# Altium PCB PL_Remote.PcbDoc
Units mil, origin at the board's own origin, x right, y up, seen from the top; angles counter-clockwise.
Board outline 1770 x 4885 mil, 2 copper layers (Top Layer, Bottom Layer); 43 components, 28 nets, 186 pads, 25 vias.
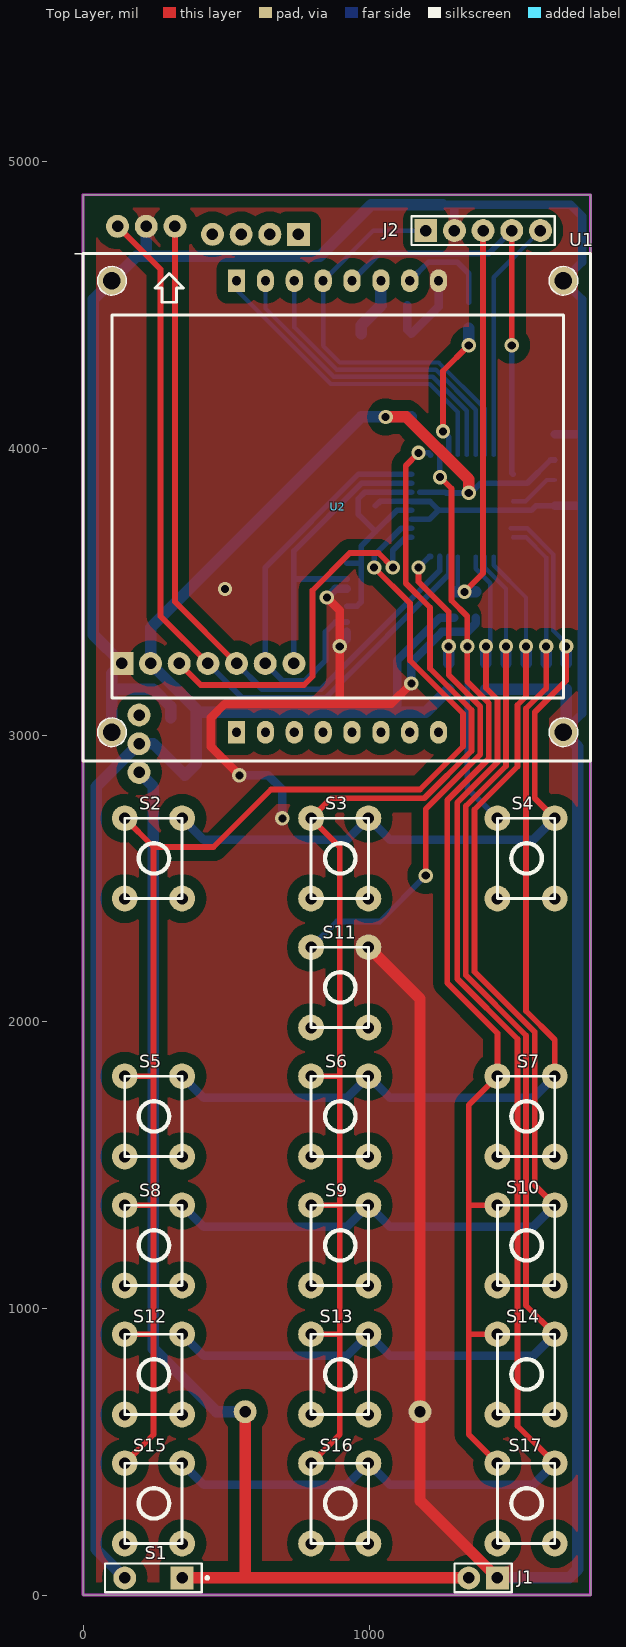
[diagram p0: Top Layer view]
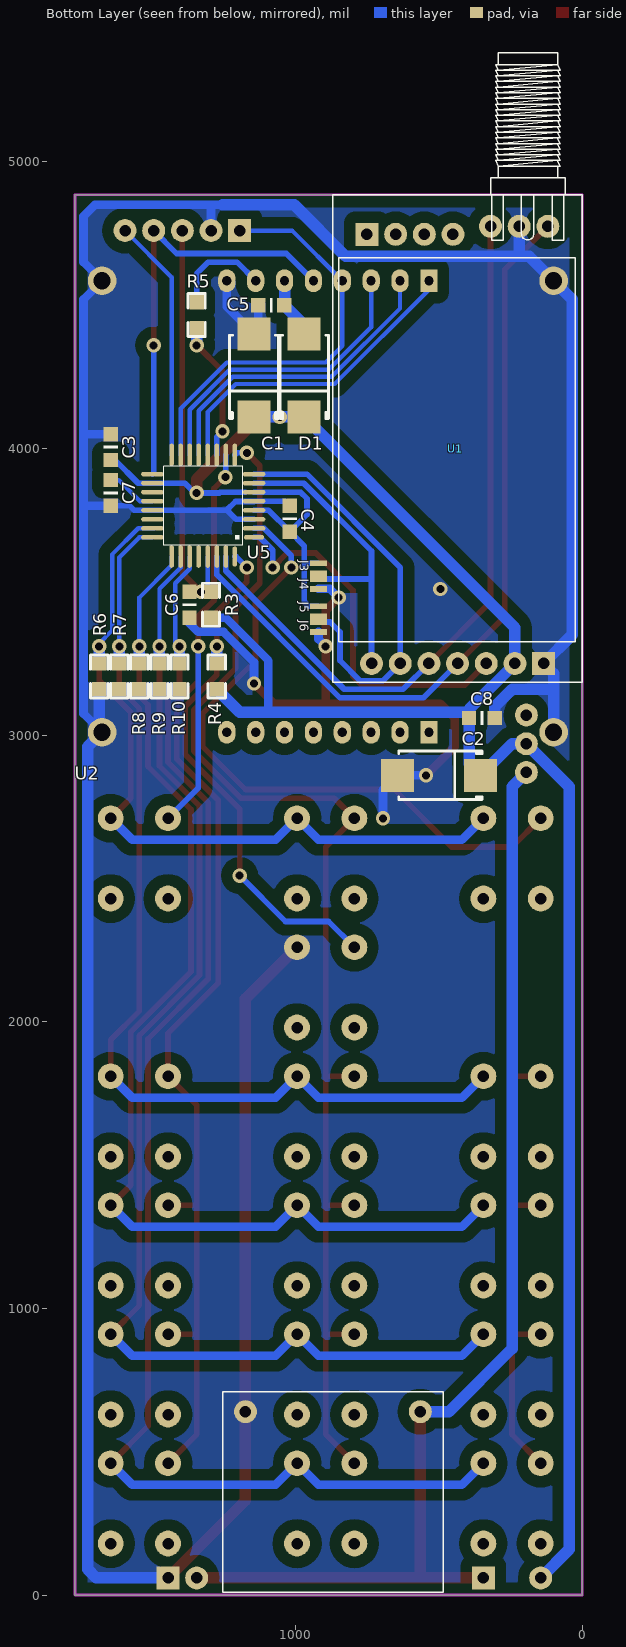
[diagram p1: Bottom Layer view, seen from below]
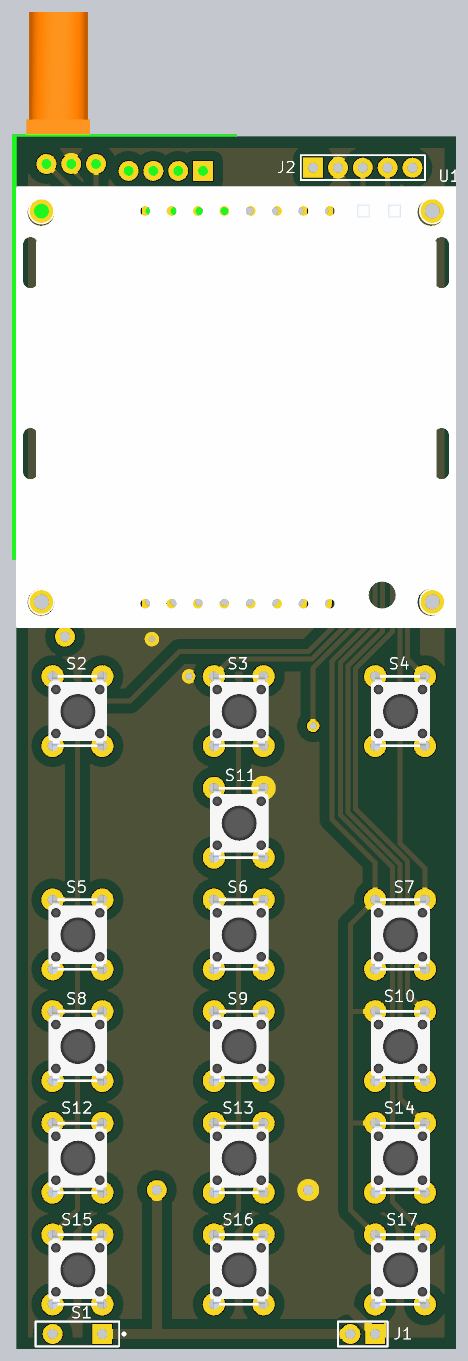
[diagram p2: 3D render of the assembled board from above, using the file's embedded part models]
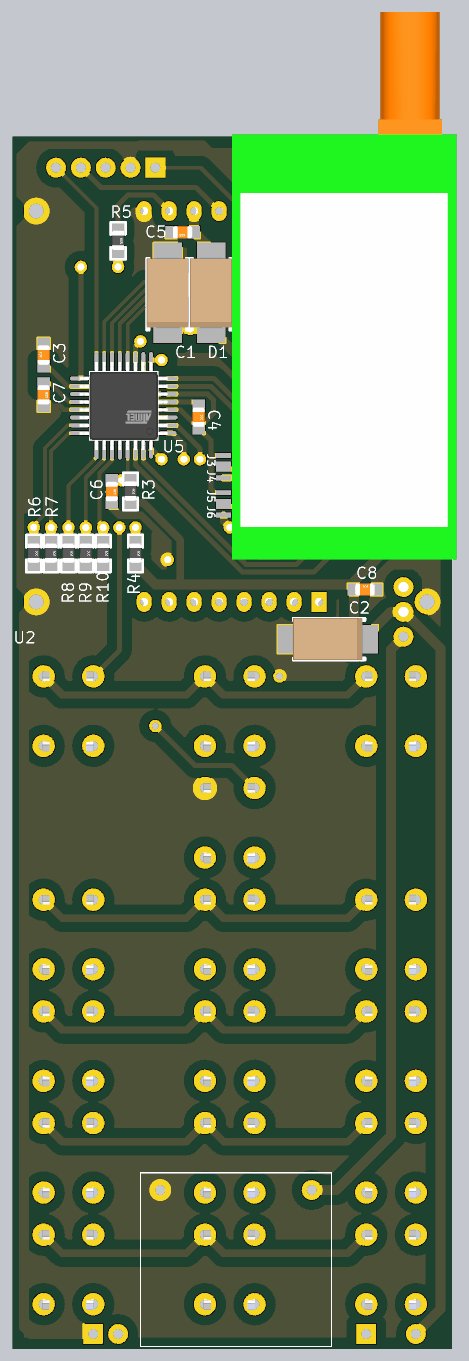
[diagram p3: 3D render of the assembled board from below, using the file's embedded part models]

## Layer stack, top to bottom
Top Solder: solder mask 0.4, Solder Resist, Dk 3.5
Top Layer: signal copper 1.4
Dielectric 1: dielectric 12.6, FR-4, Dk 4.8
Bottom Layer: signal copper 1.4
Bottom Solder: solder mask 0.4, Solder Resist, Dk 3.5

## Board outline
0,0 1770,0 1770,4885 0,4885

## Design rules (kind name [scope] priority, off if disabled: settings)
Clearance [All] p1: gap=10 ignorepadtopadclearanceinfootprint=FALSE except(0: Arc-Hole Track-Hole SMDPad-Hole THPad-Hole Via-Hole Fill-Hole Poly-Hole Region-Hole Text-Hole; 40: Arc-Poly Track-Poly SMDPad-Poly THPad-Poly Via-Poly Fill-Poly Poly-Poly)
ComponentClearance [All] p1 off: gap=10 collisioncheckmode=3 verticalgap=10 showdistances=FALSE
Height [All] p1 off: minheight=0 maxheight=1000 prefheight=500
PolygonConnect [All] p1: connectstyle=Direct reliefconductorwidth=10 reliefentries=4 polygonreliefangle="90 Angle" airgapwidth=10
RoutingVias [All] p1: holewidth=28 width=50 viastyle="Through Hole" minholewidth=28 minwidth=50 maxholewidth=28 maxwidth=50
SolderMaskExpansion [All] p1: expansion=4
Width [All] p1: maxlimit=100 minlimit=10 preferedwidth=20
28 further rules are at their usual default settings.

## Components (designator, comment, footprint, x,y, rotation, side; value= is the part's Value field where it differs from the comment)
C1 "Tụ hóa chân dán 107" SMC_D/WA 1145,4110 r90 bottom value=107
C2 "Tụ hóa chân dán 107" SMC_E/WA 355,2860 r0 bottom value=107
C3 "Tụ điện dán 0805 104" 0805C 1645,3960 r90 bottom value=104
C4 "Tụ điện dán 0805 104" 0805C 1020,3800 r270 bottom value=104
C5 "Tụ điện dán 0805 104" 0805C 1040,4500 r0 bottom value=104
C6 "Tụ điện dán 0805 104" 0805C 1370,3500 r270 bottom value=104
C7 "Tụ điện dán 0805 104" 0805C 1645,3890 r270 bottom value=104
C8 "Tụ điện dán 0805 104" 0805C 395,3060 r180 bottom value=104
D1 "Diode chân dán 1A 1N4007" SMC_D/WA 970,4110 r90 bottom value=1N5822
J1 "Jump đực loại thẳng, 2.54mm 2P" HDR1X2 1445,60 r180 top value=2P
J2 "Jump đực chân thẳng, 2.54mm 5P" HDR1x5 1195,4760 r0 top value=5P
J3 "Jumper 2P" XPAD 920,3565 r90 bottom value=2P
J4 "Jumper 2P" XPAD 920,3510 r90 bottom value=2P
J5 "Jumper 2P" XPAD 920,3415 r90 bottom value=2P
J6 "Jumper 2P" XPAD 920,3360 r90 bottom value=2P
R3 "Điện trở dán 0805 100K" 0805DD 1295,3500 r270 bottom value=100K
R4 "Điện trở dán 0805 10K" 0805DD 1275,3250 r270 bottom value=10K
R5 "Điện trở dán 0805 47R" 0805DD 1345,4510 r270 bottom value=47R
R6 "Điện trở dán 0805 10K" 0805DD 1685,3250 r270 bottom value=10K
R7 "Điện trở dán 0805 10K" 0805DD 1615,3250 r270 bottom value=10K
R8 "Điện trở dán 0805 10K" 0805DD 1545,3250 r270 bottom value=10K
R9 "Điện trở dán 0805 10K" 0805DD 1475,3250 r270 bottom value=10K
R10 "Điện trở dán 0805 10K" 0805DD 1405,3250 r270 bottom value=10K
S1 "Công tắc chân cắm BIT X1" SPST-2 245,60 r180 top value=SW_SPST
S2 "Công tắc chip chân cắm, 4 chân 6x6x4mm" CHIP 145,2710 r0 top value=6x6x4mm
S3 "Công tắc chip chân cắm, 4 chân 6x6x4mm" CHIP 795,2710 r0 top value=6x6x4mm
S4 "Công tắc chip chân cắm, 4 chân 6x6x4mm" CHIP 1445,2710 r0 top value=6x6x4mm
S5 "Công tắc chip chân cắm, 4 chân 6x6x4mm" CHIP 145,1810 r0 top value=6x6x4mm
S6 "Công tắc chip chân cắm, 4 chân 6x6x4mm" CHIP 795,1810 r0 top value=6x6x4mm
S7 "Công tắc chip chân cắm, 4 chân 6x6x4mm" CHIP 1445,1810 r0 top value=6x6x4mm
S8 "Công tắc chip chân cắm, 4 chân 6x6x4mm" CHIP 145,1360 r0 top value=6x6x4mm
S9 "Công tắc chip chân cắm, 4 chân 6x6x4mm" CHIP 795,1360 r0 top value=6x6x4mm
S10 "Công tắc chip chân cắm, 4 chân 6x6x4mm" CHIP 1445,1360 r0 top value=6x6x4mm
S11 "Công tắc chip chân cắm, 4 chân 6x6x4mm" CHIP 795,2260 r0 top value=6x6x4mm
S12 "Công tắc chip chân cắm, 4 chân 6x6x4mm" CHIP 145,910 r0 top value=6x6x4mm
S13 "Công tắc chip chân cắm, 4 chân 6x6x4mm" CHIP 795,910 r0 top value=6x6x4mm
S14 "Công tắc chip chân cắm, 4 chân 6x6x4mm" CHIP 1445,910 r0 top value=6x6x4mm
S15 "Công tắc chip chân cắm, 4 chân 6x6x4mm" CHIP 145,460 r0 top value=6x6x4mm
S16 "Công tắc chip chân cắm, 4 chân 6x6x4mm" CHIP 795,460 r0 top value=6x6x4mm
S17 "Công tắc chip chân cắm, 4 chân 6x6x4mm" CHIP 1445,460 r0 top value=6x6x4mm
U1 "Module thu phát không dây RF E32-TTL-1W" RF_AS32 135,3250 r90 bottom value=E32-TTL-1W
U2 "LCD NOKIA 5110" NOKIA5110T 0,2910 r0 top
U5 "Vi điều khiển ATMEL chân dán ATMEGA8/A" ATMEGA8 1145,3690 r90 bottom value=ATMEGA8/A

## Footprints (in the part's own frame and the unit in brackets; to place one, negate y for a bottom-side part, rotate by r counter-clockwise, add the part's x,y. Pads: shape width x height; smd on the part's side, far side on the other; paste and mask are expansions set on the pad)
0805C [mil]
  rect 50x50 smd: 1(0,0) 2(90,0)
  silkscreen extent 40,-25 50,25, body extent 6,-25 84,25, height 31
0805DD [mil]
  rect 50x50 smd: 1(0,0) 2(90,0)
  silkscreen extent -30,-30 120,30, body extent 4,-25 82,25, height 31
ATMEGA8 [mm]
  oval 0.4x1.778 smd: 1(0,0)
  oval 0.4x2 smd: 2(0.8,0) 3(1.6,0) 4(2.4,0) 5(3.2,0) 6(4,0) 7(4.8,0) 8(5.6,0) 17(5.6,9) 18(4.8,9) 19(4,9) 20(3.2,9) 21(2.4,9) 22(1.6,9) 23(0.8,9) 24(0,9)
  oval 2x0.4 smd: 9(7.3,1.7) 10(7.3,2.5) 11(7.3,3.3) 12(7.3,4.1) 13(7.3,4.9) 14(7.3,5.7) 15(7.3,6.5) 16(7.3,7.3) 25(-1.7,7.3) 26(-1.7,6.5) 27(-1.7,5.7) 28(-1.7,4.9) 29(-1.7,4.1) 30(-1.7,3.3) 31(-1.7,2.5)
  oval 1.778x0.4 smd: 32(-1.7,1.7)
  silkscreen extent -0.7,1 6.3,8, body extent -1.72,0 7.29,9.02, height 1.15
CHIP [mil]
  round 90 hole 40: 1(0,0) 2(200,0) 3(0,-280) 4(200,-280)
  silkscreen extent 0,-280 200,0, body extent -16,-303 220,20, height 375
HDR1X2 [mil] "Connector; Header; 2 Position"
  rect 80x80 hole 40: 1(0,0)
  round 80 hole 40: 2(100,0)
  silkscreen extent -50,-50 150,50
HDR1x5 [mil] "Connector; Header; 5 Position"
  rect 80x80 hole 40: 1(0,0)
  round 80 hole 40: 2(100,0) 3(200,0) 4(300,0) 5(400,0)
  silkscreen extent -50,-50 450,50
NOKIA5110T [mil]
  round 100 hole 60: 0(100,100) 0(100,1675) 0(1675,100) 0(1675,1675)
  rect 60x80 hole 32: 0(535,100) 1(535,1675)
  oval 60x80 hole 32: 0(635.71,100) 0(736.43,100) 0(837.14,100) 0(937.86,100) 0(1038.57,100) 0(1139.29,100) 0(1240,100) 2(635.71,1675) 3(736.43,1675) 4(837.14,1675) 5(937.86,1675) 6(1038.57,1675) 7(1139.29,1675) 8(1240,1675)
  silkscreen extent 0,0 1770,1770, body extent -2,-2 1770,1770, height 277
RF_AS32 [mil]
  round 80 hole 40: 0(1497,316) 0(1497,416) 0(1497,516) 2(0,100) 3(0,200) 4(0,300) 5(0,400) 6(0,500) 7(0,600)
  rect 80x80 hole 40: 0(1497,616) 1(0,0)
  silkscreen extent -65,-135 2130,735, body extent -68,-154 2136,752, height 532
SMC_D/WA [mil]
  rect 115x115 smd: 1(0,0) 2(290,0)
  silkscreen extent -5,-85 285,85, body extent 1,-84 289,85, height 75
SMC_E/WA [mil]
  rect 115x115 smd: 1(0,0) 2(290,0)
  silkscreen extent -5,-85 285,85, body extent 1,-85 289,84, height 75
SPST-2 [mil] "Switch; 2 Leads"
  rect 80x80 hole 40: 1(-100,0)
  round 80 hole 40: 2(100,0)
  silkscreen extent -192,-50 169,50
XPAD [mil]
  rect 20x60 smd: 1(0,0) 2(35,0)

## Part data
C1 C2: library part "Cap Pol1", "Polarized Capacitor (Radial)", Type1="T? hóa chân c?m", Type2="T? hóa chân dán"
C3 C4 C5 C6 C7 C8: library part CAP, Type1="T? di?n dán 0805", Type2="T? di?n chân c?m"
D1: library part DIODE, Value2=1N4007, Type1="Diode xung chân c?m 3A", Type2="Diode ch?nh luu chân c?m 1A", Type3="Diode ch?nh luu chân c?m 3A", Type4="Diode chân dán 1A"
J1 J3 J4 J5 J6: library part CON2, Type1="Gi?c xanh lo?i n?m, 300V/16A - 5.08mm", Type2="Jump d?c lo?i th?ng, 2.54mm", Type3=Jumper, Type4="Gi?c xanh lo?i n?m, 300V/16A - 3.81mm"
J2: library part CON5, "Connector"
R3 R4 R5 R6 R7 R8 R9 R10: library part "RES semi", "Semiconductor Resistor", Type1="Ði?n tr? dán 0805", Type2="Ði?n tr? chân c?m 1/4W", Type3="Ði?n tr? chân c?m 2W"
S1: library part SW-SPST, "Single-Pole, Single-Throw Switch", LatestRevisionDate=17-Jul-2002, LatestRevisionNote="Re-released for DXP Platform.", PackageDescription="Switch; 2 Leads", PackageReference=SPST-2, Published=24-Mar-1999, Publisher="Altium Limited"
S2 S3 S4 S5 S6 S7 S8 S9 S10 S11 S12 S13 S14 S15 S16 S17: library part SW-PB, Type1="Công t?c chip chân c?m, 4 chân"
U1: library part AS32-TTL-1W, "AS32-TTL-1W", Type1="Module thu phát không dây RF"
U5: library part ATMEGA8-A, "TQFP package", Type1="Vi di?u khi?n ATMEL chân dán"

## Free pads (board coordinates)
  round 80 hole 40: 0(120,4775) 0(220,4775) 0(320,4775) 1(1175,640) 2(565,640) 4(195,3070) 5(195,2970) 6(195,2870)

## Via types
v1: diameter 50, hole 28, Top Layer to Bottom Layer, 25 vias

## Nets (pads, with @x,y where several pads share a name; then routed paths per layer and width w, separated by ;. In a path a pad name is that pad's centre, name@x,y a point inside that pad or via, vN(x,y) a via of type N, cw(c..) or ccw(c..) an arc to the next point about the centre after c; other vN are vias at no path point)
+3.6V: C1.1 C2.1 C3.1 C4.2 C8.1 D1.1 J3.2 J5.2 pad.5 R3.2 R4.2 S1.2 U1.2 U5.4 U5.6 U5.18 | length 8185.3
  Top Layer w40: v1(1055,4110) 1127.22,4110 1345,3892.22 v1(1345,3845)
  Bottom Layer w20: J5.2 955,3450 970,3465 970,3600 ; J3.2 970,3600 ; U5.4 1094.49,3784.49 C4.2 ; U5.6 982.48,3847.48 960,3825 960,3770 C4.2 ; U5.6@1174.37,3847.48 1263.88,3847.48 1266.36,3845 v1(1345,3845) 1352.24,3845 1386.21,3878.98 U5.18 1548.98,3878.98 1630,3960 C3.1 ; 970,3600 970,3660 C4.2
  Bottom Layer w30: 1095,3080 1095,3260 1245,3410 R3.2
  Bottom Layer w40: S1.2 45,160 45,2820 pad.5 245,2970 C2.1 395,2900 C8.1 395,3080 1195,3080 R4.2 ; 395,3090 U1.2 235,3375 D1.1 v1(1055,4110) C1.1
BAT: J1.2 pad.2 pad.6 S1.1 | length 4021.8
  Top Layer w40: S1.1 J1.2 ; 565,60 pad.2
  Bottom Layer w40: pad.6 245,2820 245,860 465,640 pad.2
COL1: S2.1 S5.1 S8.1 S12.1 S15.1 U5.2 | length 4831.3
  Top Layer w20: S15.1 245,560 245,910 ; S12.1 245,910 ; S8.1 240,1360 245,1355 ; S5.1 240,1810 245,1815 ; S2.1 245,2610 ; v1@1020,3585 v1(1015,3585) 1140,3460 1140,3260 1325,3075 1325,2960 1175,2810 655,2810 455,2610 245,2610 ; 245,910 245,1355 ; 245,1355 245,1815 ; 245,1815 245,2610
  Bottom Layer w20: v1(1015,3585) 1015,3626.72 1109.78,3721.5 U5.2
COL2: S3.1 S6.1 S9.1 S13.1 S16.1 U5.9 | length 4489.2
  Top Layer w20: S16.1 895,560 895,910 ; S13.1 895,910 ; S9.1 895,1360 ; S6.1 895,1810 ; v1(1170,3985) 1125,3940 1125,3530 1210,3445 1210,3232.43 1355,3087.43 1355,2945 1190,2780 865,2780 S3.1 895,2610 895,1810 ; 895,910 895,1360 ; 895,1360 895,1810
  Bottom Layer w20: v1(1170,3985) 1204.33,3985 U5.9
COL3: S4.1 S7.1 S10.1 S14.1 S17.1 U5.10 | length 4647.4
  Top Layer w20: v1(1245,3900) 1285,3860 1285,3470 1340,3415 v1(1340,3310) 1340,3187.28 1415,3112.28 1415,2917.57 1270,2772.57 1270,2135 1445,1960 S7.1 1345,1710 1345,1360 ; S17.1 1345,560 1345,910 ; S14.1 1345,910 ; S10.1 1345,1360 ; 1345,910 1345,1360
  Bottom Layer w20: U5.10 1243.43,3901.57 v1(1245,3900) ; v1(1340,3310) 1340,2815 S4.1
GND: C1.2 C2.2 C3.2 C4.1 C5.2 C6.2 C7.2 C8.2 J1.1 J2.2 J4.1 J6.1 pad.0@220,4775 pad.1 R6.2 R7.2 R8.2 R9.2 R10.2 S11.2 U1.1 U2.0@100,3010 U2.0@100,4585 U2.0@1675,3010 U2.0@1675,4585 U2.8 U5.3 U5.5 U5.21 | length 15255.7
  Top Layer w30: v1(545,2860) 445,2960 445,3060 495,3110 895,3110 ; v1(850,3480) 895,3435 v1(895,3310) 895,3110 ; v1(1145,3180) 1075,3110 895,3110
  Top Layer w40: S11.2 1175,2080 pad.1 1175,330 J1.1
  Bottom Layer w20: C4.1 1035.98,3815.98 U5.5 ; U5.3 1207.99,3752.99 1239.49,3784.49 1564,3784.49 1579.51,3800 C7.2 ; U5.5@1145.98,3815 1210,3815 1240,3785
  Bottom Layer w30: v1(545,2860) C2.2 695,2810 v1(695,2710) ; v1(850,3480) 880,3510 J4.1 ; v1(895,3310) 920,3335 J6.1 ; C5.2 1130,4415 C1.2 1240,4495 U2.8 ; v1(1145,3180) 1145,3253.43 1251.57,3360 1340,3360 1370,3390 C6.2 ; 1255,4850 1295,4850 ; J2.2 1295,4850 ; C7.2 1740,3800 ; C3.2 1740,4050 ; U2.0@1675,3010 1685,3020 1740,3075 1740,3800 ; 1295,4850 1700,4850 1740,4810 1740,4650 1675,4585 1740,4520 1740,4050 ; 1740,3800 1740,4050
  Bottom Layer w40: U2.0@100,3010 100,3160 ; pad.0@220,4775 220,4670 ; C8.2 305,3100 245,3160 100,3160 ; 1255,4850 1005,4850 825,4670 220,4670 ; R10.2 R9.2 R8.2 R7.2 R6.2 U2.0@1685,3020 ; J1.1 1695,60 1725,90 1725,2960 U2.0@1675,3010 ; 100,3160 100,3215 U1.1 35,3350 35,4520 100,4585 185,4670 220,4670
  other v1: 495,3510
LCD_DC: U2.3 U5.14 | length 1071.9
  Bottom Layer w15: U2.3 736.43,4423.22 884.64,4275 1229.64,4275 1369.41,4135.24 U5.14
LCD_LED: R5.2 U5.11 | length 488.1
  Top Layer w20: v1(1255,4060) 1255,4270 v1(1345,4360)
  Bottom Layer w20: v1(1255,4060) 1274.92,4040.08 U5.11
  Bottom Layer w40: v1(1345,4360) R5.2
LCD_RESET: U2.1 U5.12 | length 1129.2
  Bottom Layer w15: U2.1 535,4553.93 863.93,4225 1208.93,4225 1306.42,4127.52 U5.12
LCD_SCE: U2.2 U5.13 | length 1100.6
  Bottom Layer w15: U2.2 635.71,4488.58 874.29,4250 1219.29,4250 1337.91,4131.38 U5.13
MD0: J3.1 J4.2 U1.7 U5.7 | length 1087.6
  Bottom Layer w20: U1.7 735,3550 ; J4.2 740,3545 735,3550 ; U5.7 971.4,3878.98 735,3642.57 735,3550
MD1: J5.1 J6.2 U1.6 U5.8 | length 1433.2
  Bottom Layer w20: J6.2 880,3395 845,3360 845,3260 775,3190 695,3190 U1.6 635,3585 960.47,3910.47 U5.8
MODULE_POWER: C5.1 D1.2 U2.6 | length 214.6
  Bottom Layer w40: D1.2 970,4430 C5.1 1038.57,4501.43 U2.6
NetC7_1: C7.1 U5.20 | length 176.3
  Bottom Layer w15: U5.20 1542.98,3815.98 1617,3890 C7.1
NetR4_1: R4.1 S11.1 U5.32 | length 1864
  Top Layer w20: v1(1170,3585) 1170,3535 1275,3430 v1(1275,3310) 1275,3209.85 1385,3099.85 1385,2932.57 1195,2742.57 v1(1195,2510)
  Bottom Layer w20: S11.1 885,2350 1035,2350 v1(1195,2510) ; v1(1170,3585) 1208.07,3623.07 U5.32
  Bottom Layer w40: R4.1 v1(1275,3310)
NetR5_1: R5.1 U2.7 | length 349.2
  Bottom Layer w20: U2.7 1204.29,4650 1305,4650 1345,4610 R5.1
RFAUX: U1.3 U5.1 | length 1306.7
  Top Layer w20: U1.3 410,3175 770,3175 800,3205 800,3505 930,3635 1030,3635 v1(1080,3585)
  Bottom Layer w20: v1(1080,3585) 1080,3645 1125,3690 U5.1
ROW1: R6.1 S2.2 S3.2 S4.2 U5.23 | length 2684.4
  Top Layer w20: S4.2 1575,2780 1575,3080.15 1685,3190.15 v1(1685,3310)
  Bottom Layer w15: U5.23@1491.12,3721.5 1548.86,3721.5 1640,3630.36 1640,3365 1685,3320 v1(1685,3310)
  Bottom Layer w30: S2.2 420,2635 920,2635 S3.2 1070,2635 1570,2635 S4.2
  Bottom Layer w40: R6.1 v1(1685,3310)
ROW2: R7.1 S5.2 S6.2 S7.2 U5.24 | length 3509.3
  Top Layer w20: v1(1615,3310) 1615,3162.57 1545,3092.57 1545,2037.28 1645,1937.28 S7.2
  Bottom Layer w15: U5.24 1545,3690 1615,3620 v1(1615,3310)
  Bottom Layer w30: S5.2 420,1735 920,1735 S6.2 1070,1735 1570,1735 S7.2
  Bottom Layer w40: R7.1 v1(1615,3310)
ROW3: R8.1 S8.2 S9.2 S10.2 U5.25 | length 3984.5
  Top Layer w20: v1(1545,3310) 1545,3135 1515,3105 1515,2890.29 1365,2740.29 1365,2174.85 1575,1964.85 1575,1430 S10.2
  Bottom Layer w15: U5.25 1432.4,3592.6 1545,3480 v1(1545,3310)
  Bottom Layer w30: S8.2 420,1285 920,1285 S9.2 1070,1285 1570,1285 S10.2
  Bottom Layer w40: R8.1 v1(1545,3310)
ROW4: R9.1 S12.2 S13.2 S14.2 U5.26 | length 4414.4
  Top Layer w20: v1(1475,3310) 1475,2892.72 1335,2752.72 1335,2162.43 1545,1952.43 1545,1010 S14.2
  Bottom Layer w15: U5.26 1400.91,3584.45 1475,3510.36 v1(1475,3310)
  Bottom Layer w30: S12.2 420,835 920,835 S13.2 1070,835 1570,835 S14.2
  Bottom Layer w40: R9.1 v1(1475,3310)
ROW5: R10.1 S15.2 S16.2 S17.2 U5.27 | length 4889.9
  Top Layer w20: v1(1405,3310) 1405,3164.71 1445,3124.71 1445,2905.15 1305,2765.15 1305,2150 1515,1940 1515,590 S17.2
  Bottom Layer w15: U5.27 1369.41,3580.59 1420,3530 1420,3325 v1(1405,3310)
  Bottom Layer w30: S15.2 420,385 920,385 S16.2 1070,385 1570,385 S17.2
  Bottom Layer w40: R10.1 v1(1405,3310)
RST: C6.1 J2.3 R3.1 U5.29 | length 1502.9
  Top Layer w20: v1(1330,3500) 1395,3565 J2.3
  Bottom Layer w15: R3.1@1297.84,3500 1306.42,3491.42 U5.29
  Bottom Layer w40: R3.1@1297.84,3500 C6.1
RXD: pad.0@120,4775 U1.4 U5.30 | length 2786.3
  Top Layer w20: pad.0@120,4775 270,4625 270,3415 U1.4
  Bottom Layer w20: U1.4 555,3130 845,3130 1274.92,3559.92 U5.30
SPI_MISO: J2.5 U5.16 | length 849.9
  Bottom Layer w15: U5.16 1432.4,4597.4 J2.5
SPI_MOSI: J2.1 U2.4 U5.15 | length 1473.6
  Bottom Layer w15: J2.1 1012.14,4760 U2.4 837.14,4357.86 895,4300 1240,4300 1400.91,4139.09 U5.15
SPI_SCK: J2.4 U2.5 U5.17 | length 1481
  Top Layer w20: v1(1495,4360) J2.4
  Bottom Layer w20: U2.5 1032.86,4680 1415,4680 J2.4 ; v1(1495,4360) 1495,3914.8 U5.17
TXD: pad.0@320,4775 U1.5 U5.31 | length 2580.7
  Top Layer w20: pad.0@320,4775 320,3465 U1.5
  Bottom Layer w20: U1.5 625,3160 830,3160 1243.43,3573.43 U5.31
pads on no net: S2.3 S2.4 S3.3 S3.4 S4.3 S4.4 S5.3 S5.4 S6.3 S6.4 S7.3 S7.4 S8.3 S8.4 S9.3 S9.4 S10.3 S10.4 S11.3 S11.4 S12.3 S12.4 S13.3 S13.4 S14.3 S14.4 S15.3 S15.4 S16.3 S16.4 S17.3 S17.4 U1.0 U2.0@535,3010 U2.0@635.71,3010 U2.0@736.43,3010 U2.0@837.14,3010 U2.0@937.86,3010 U2.0@1038.57,3010 U2.0@1139.29,3010 U2.0@1240,3010 U5.19 U5.22 U5.28

## Polygon pours and split planes (outlines as drawn)
GND on Bottom Layer "Top Layer-No Net" (solid, remove dead copper, pour order 2): 0,4885 1770,4885 1770,0 0,0 0,4885
GND on Top Layer "Top Layer-No Net" (solid, remove dead copper, pour order 0): 0,4885 1770,4885 1770,0 0,0 0,4885

## Keep-outs
Keep-Out Layer:
  the board outline again, w10

## Silkscreen, mask and mechanical layers (free items; w line width, h text height)
Top Overlay:
  lines w5: -29,4680 0,4680
Bottom Overlay:
  lines w5: 485,10 485,710 1255,710 1255,10 485,10